# Altium PCB 幻彩灯带V0.PcbDoc
Units mm, origin at the board's own origin, x right, y up, seen from the top; angles counter-clockwise.
Board outline 60.15 x 76.21 mm, 2 copper layers (Top Layer, Bottom Layer); 26 components, 18 nets, 97 pads, 11 vias.
Unrouted connection lines stored in the file: 1.
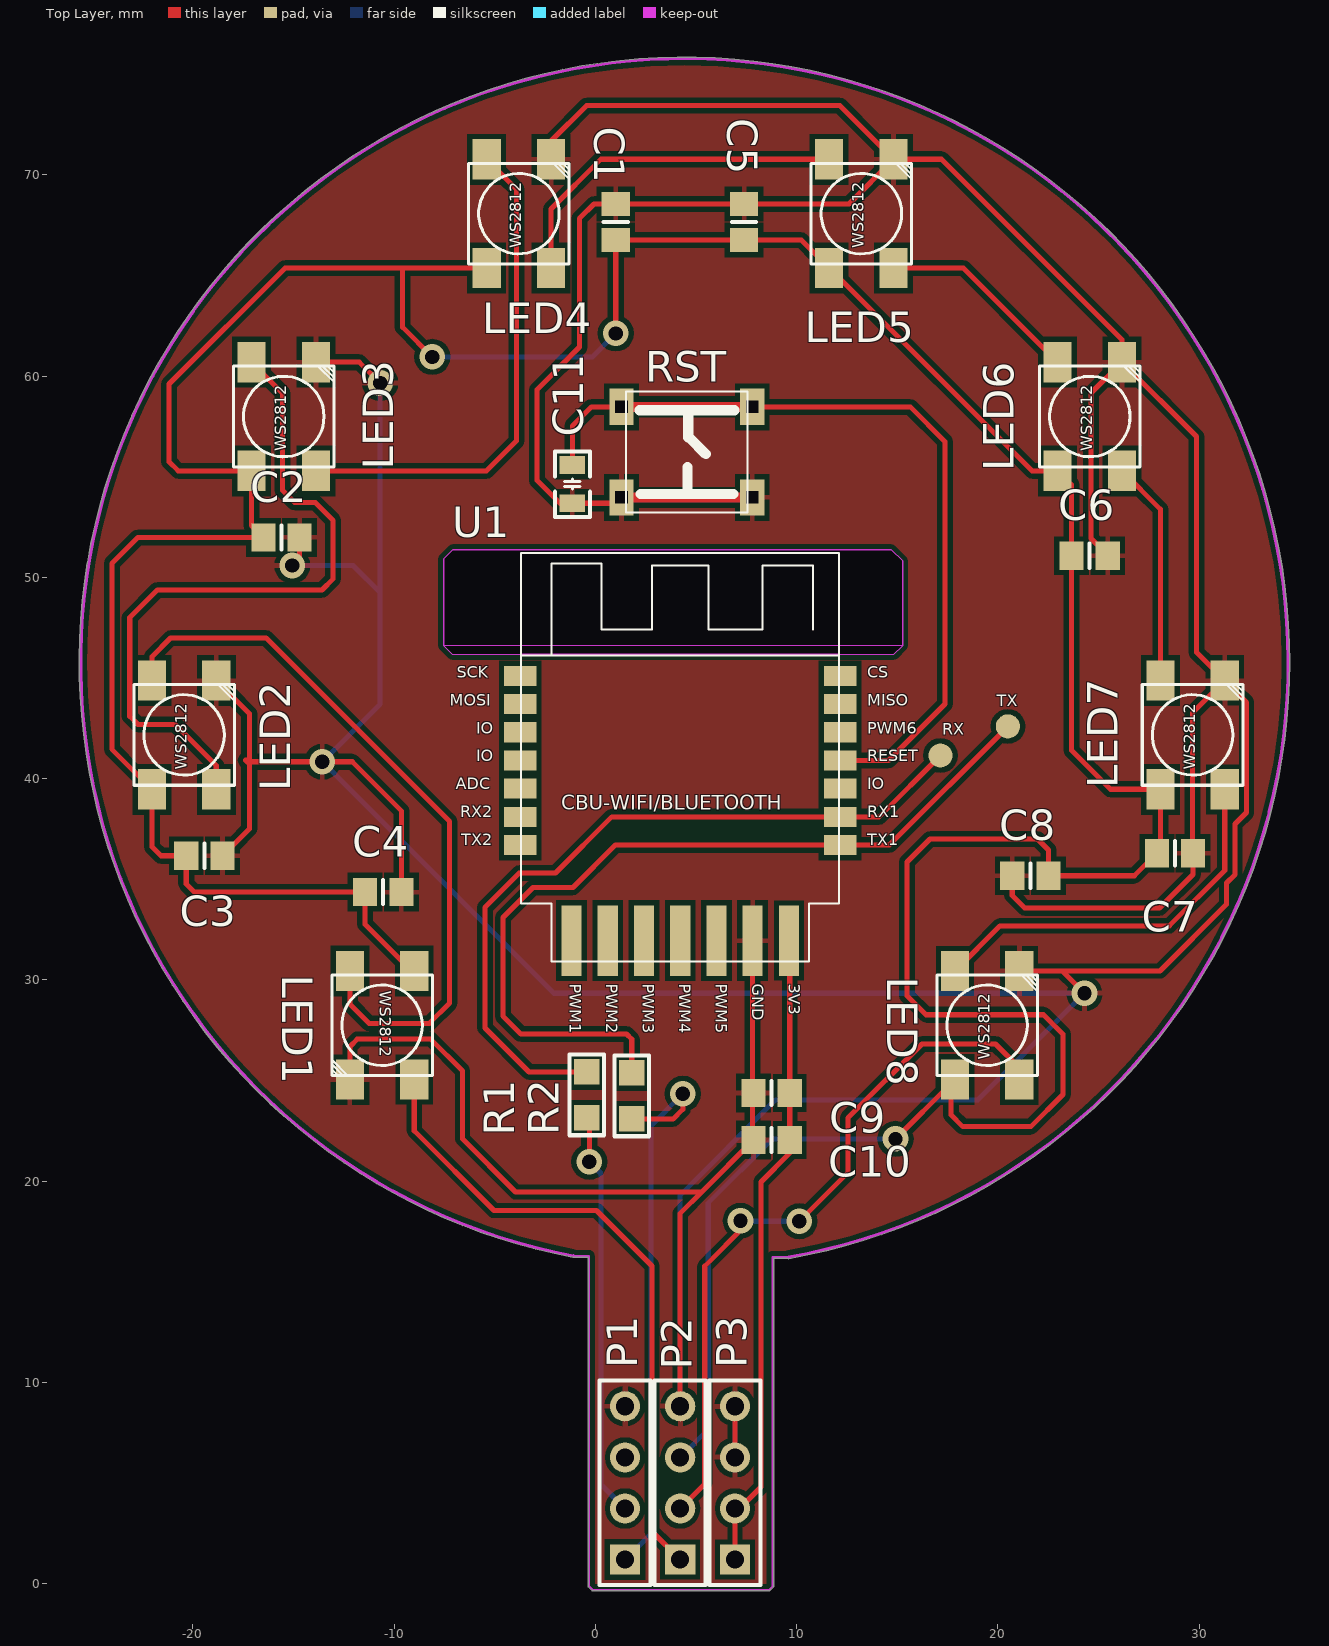
[diagram p0: Top Layer view]
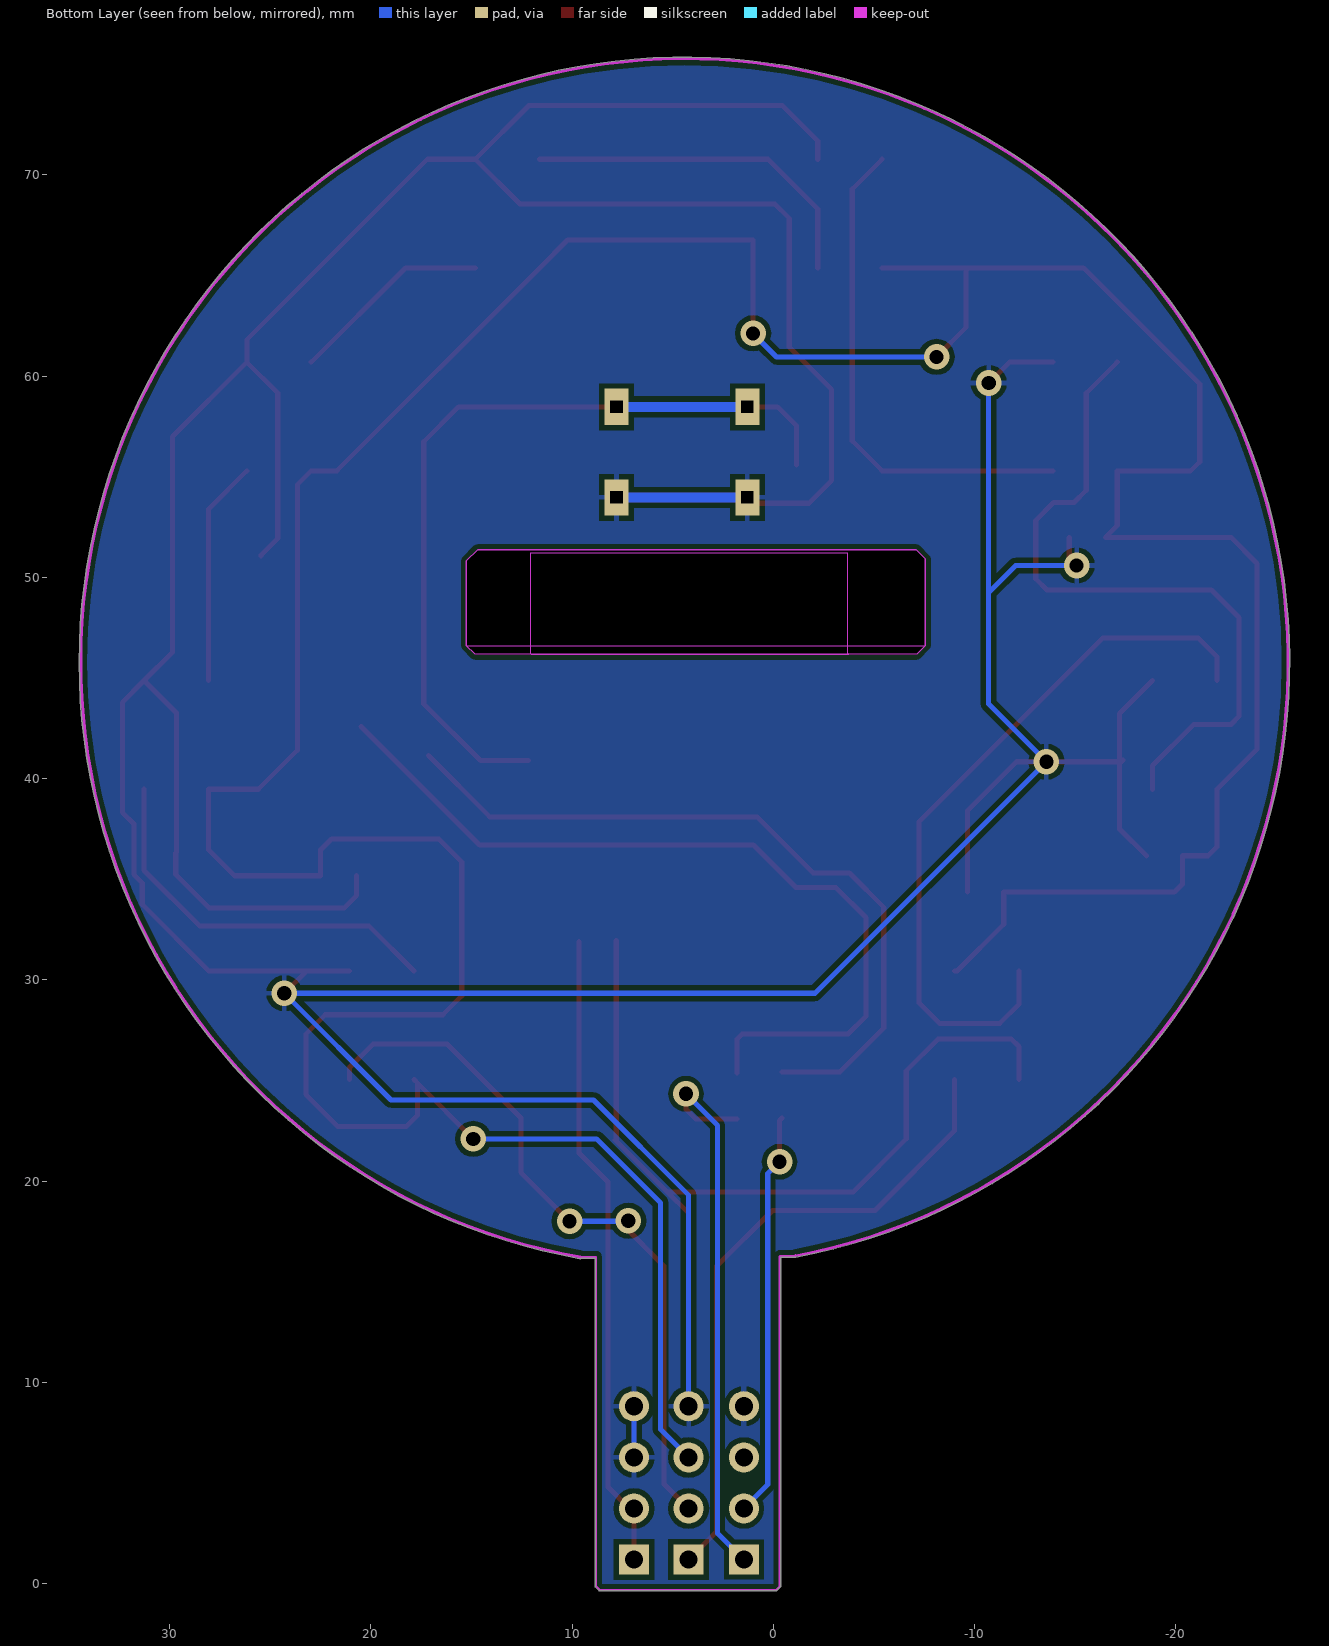
[diagram p1: Bottom Layer view, seen from below]

## Layer stack, top to bottom
Top Solder: solder mask 0.0102, Solder Resist, Dk 3.5
Top Layer: signal copper 0.0356
Dielectric 1: dielectric 0.32, FR-4, Dk 4.8
Bottom Layer: signal copper 0.0356
Bottom Solder: solder mask 0.0102, Solder Resist, Dk 3.5

## Board outline
-0.36,-0.132 ccw(c-0.31,-0.132) -0.345,-0.168 -0.346,-0.168 -0.168,-0.346 -0.168,-0.345 ccw(c-0.132,-0.31) -0.132,-0.36 8.631,-0.36 ccw(c8.631,-0.31) 8.667,-0.345 8.666,-0.346 8.844,-0.168 ccw(c8.809,-0.132) 8.859,-0.132 8.859,16.175 9.54,16.175 ccw(c9.596,16.225) 9.609,16.151 ccw(c4.421,45.776) 34.497,45.776 ccw(c4.421,45.776) -1.115,16.214 ccw(c-1.102,16.288) -1.06,16.226 -0.36,16.226
cut-out: -7.549,46.604 -7.549,50.922 -7.092,51.379 14.701,51.379 15.26,50.82 15.26,46.604
cut-out: -7.549,46.604 -7.549,50.922 -7.092,51.379 14.701,51.379 15.26,50.82 15.26,46.604
cut-out: -7.549,46.604 -7.117,46.172 14.828,46.172 15.26,46.604 15.26,50.82 14.701,51.379 -7.092,51.379 -7.549,50.922
cut-out: -3.739,46.172 -3.688,46.223 -3.688,51.201 12.085,51.201 12.085,46.223 12.034,46.172

## Design rules (kind name [scope] priority, off if disabled: settings)
Clearance [All] p1: gap=0.254
PolygonConnect [All] p1: connectstyle=Relief reliefconductorwidth=0.254 reliefentries=4 polygonreliefangle="90 Angle" airgapwidth=0.254
RoutingVias [All] p1: holewidth=0.711 width=1.27 viastyle="Through Hole" minholewidth=0.711 minwidth=1.27 maxholewidth=0.711 maxwidth=1.27
SolderMaskExpansion [All] p1: expansion=0.102
Width [All] p1: maxlimit=1 minlimit=0.254 preferedwidth=0.254
30 further rules are at their usual default settings.

## Components (designator, comment, footprint, x,y, rotation, side; value= is the part's Value field where it differs from the comment)
C1 "0.1uF" 6-0805_N 1.011,67.66 r90 top
C2 "Cap" 6-0805_N -15.601,51.989 r0 top
C3 "Cap" 6-0805_N -19.436,36.164 r0 top
C4 "Cap" 6-0805_N -10.546,34.361 r0 top
C5 "0.1uF" 6-0805_N 7.386,67.66 r270 top
C6 "0.1uF" 6-0805_N 24.557,51.074 r180 top
C7 "0.1uF" 6-0805_N 28.798,36.291 r180 top
C8 "0.1uF" 6-0805_N 21.61,35.174 r0 top
C9 "10uF" 6-0805_N 8.758,24.379 r180 top
C10 "100pF" 6-0805_N 8.758,22.042 r180 top
C11 "1uF" "C 0805_L" -1.143,54.635 r270 top
LED1 "WS2812B-4" LED -8.103,30.242 r270 top
LED2 "WS2812B-4" LED -22.941,39.67 r90 top
LED3 "WS2812B-4" LED -17.988,55.494 r90 top
LED4 "WS2812B-4" LED -6.304,65.578 r90 top
LED5 "WS2812B-4" LED 10.714,65.578 r90 top
LED6 "WS2812B-4" LED 22.067,55.494 r90 top
LED7 "WS2812B-4" LED 27.173,39.67 r90 top
LED8 "WS2812B-4" LED 16.962,25.242 r90 top
P1 "Header 4" HDR1X4 1.468,1.189 r90 top
P2 "Header 4" HDR1X4 4.211,1.189 r90 top
P3 "Header 4" HDR1X4 6.929,1.189 r90 top
R1 "1K" "R 0805_M" -0.432,24.282 r270 top
R2 "1K" "R 0805_M" 1.803,24.232 r270 top
RST "BUTTON" BUTTON6*6 1.295,53.975 r180 top
U1 "CBU-WIFI/BLE" CBU -3.688,51.201 r0 top

## Footprints (in the part's own frame and the unit in brackets; to place one, negate y for a bottom-side part, rotate by r counter-clockwise, add the part's x,y. Pads: shape width x height; smd on the part's side, far side on the other; paste and mask are expansions set on the pad)
6-0805_N [mm] "Chip Resistor, Body 2.0x1.2mm, IPC Medium Density"
  rect 1.2x1.4 smd: 1(-0.9,0) 2(0.9,0)
  silkscreen extent 0,-0.6 0,0.6, body extent -1.07,-0.7 1.07,0.7, height 0.7
BUTTON6*6 [mm] "6*6微动开关"
  rect 1.2x1.8 hole 0.6 square: 1(-6.5,0) 1(0,0) 2(-6.5,-4.5) 2(0,-4.5)
  Top Layer lines w0.5: 0,0 -6.5,0 ; 0,-4.5 -6.5,-4.5
  Bottom Layer lines w0.5: 0,0 -6.5,0 ; 0,-4.5 -6.5,-4.5
  silkscreen extent -6.25,-5.27 -0.23,0.75
"C 0805_L" [mil] "无极性贴片电容"
  rect 35x50 smd: 1(-37.4,0) 2(37.4,0)
  silkscreen extent -64,-34 64,34, body extent -39,-24 39,24, height 20
CBU [mm] "CBU-WIFI/BLE"
  rect 1.6x1 smd: 1(-0.05,-6.1) 2(-0.05,-7.5) 3(-0.05,-8.9) 4(-0.05,-10.3) 5(-0.05,-11.7) 6(-0.05,-13.1) 7(-0.05,-14.5) 15(15.85,-14.5) 16(15.85,-13.1) 17(15.85,-11.7) 18(15.85,-10.3) 19(15.85,-8.9) 20(15.85,-7.5) 21(15.85,-6.1)
  rect 1x3.5 smd: 8(2.5,-19.25) 9(4.3,-19.25) 10(6.1,-19.25) 11(7.9,-19.25) 12(9.7,-19.25) 13(11.5,-19.25) 14(13.3,-19.25)
  silkscreen extent 0,-20.3 15.8,0
HDR1X4 [mm] "Connector; Header; 4 Position"
  rect 1.5x1.5 hole 0.9: 1(0,0)
  round 1.5 hole 0.9: 2(2.54,0) 3(5.08,0) 4(7.62,0)
  silkscreen extent -1.27,-1.27 8.89,1.27
LED [mm] "WS2812B-4"
  rect 2x1.4 smd: 1(-0.2,-0.9) 2(-0.2,-4.1) 3(5.2,-4.1) 4(5.2,-0.9)
  silkscreen extent 0,-5 5,0
"R 0805_M" [mil] "1/8W贴片电阻"
  rect 50x50 smd: 1(-45.01,-0.01) 2(45,0)
  silkscreen extent -79,-34 79,34, body extent -39,-25 39,25, height 20

## Part data
C1 C5 C6 C7 C8 C9 C10: library part Cap, "Capacitor"
C2 C3 C4: "Capacitor"
C11: library part Cap
LED1 LED2 LED3 LED4 LED5 LED6 LED7 LED8: library part LED
P1 P2 P3: "Header, 4-Pin"
R1 R2: library part REGISTER

## Free pads (board coordinates)
  round 1.2 smd: 2(17.145,41.148) 3(20.498,42.596)

## Via types
v1: diameter 1.27, hole 0.711, Top Layer to Bottom Layer, 11 vias

## Nets (pads, with @x,y where several pads share a name; then routed paths per layer and width w, separated by ;. In a path a pad name is that pad's centre, name@x,y a point inside that pad or via, vN(x,y) a via of type N, cw(c..) or ccw(c..) an arc to the next point about the centre after c; other vN are vias at no path point)
3V3: C9.1 C10.1 P3.1 P3.2 U1.14 | length 32
  Top Layer w0.254: P3.1 P3.2 7.158,3.729 8.224,4.795 8.224,19.959 9.658,21.393 C10.1 C9.1 U1.14@9.658,31.905
5V: C1.1 C2.1 C3.1 C4.1 C5.2 C6.2 C7.2 C8.2 LED1.1 LED2.1 LED3.1 LED4.1 LED5.1 LED6.1 LED7.1 LED8.1 P1.3 P2.3 | length 208
  Top Layer w0.254: LED1.1 -9.124,30.442 -11.446,32.765 C4.1 -19.934,34.361 -20.336,34.763 C3.1 -21.595,36.164 -22.041,36.611 LED2.1 -24.034,41.462 -24.034,50.693 -22.738,51.989 C2.1 -17.088,52.576 LED3.1 -20.735,55.294 -21.189,55.748 -21.189,59.609 -15.42,65.378 -9.683,65.378 ; v1(-8.108,60.955) -9.581,62.428 -9.581,65.276 -9.683,65.378 ; LED4.1 -9.683,65.378 ; v1(1.011,62.123) C1.1 C5.2 10.231,66.76 LED5.1 21.697,55.294 LED6.1 23.657,54.605 C6.2 23.657,41.408 25.595,39.47 LED7.1 28.073,36.466 C7.2 26.781,35.174 C8.2 22.51,36.458 21.966,37.003 16.632,37.003 15.489,35.86 15.489,29.205 16.429,28.265 22.271,28.265 23.236,27.3 23.236,24.303 21.636,22.702 18.257,22.702 17.677,23.283 LED8.1@17.677,24.858 ; v1(14.912,22.093) LED8.1@17.677,24.858 ; LED8.1 LED8.1@17.677,24.858
  Bottom Layer w0.254: v1(-8.108,60.955) -0.158,60.955 v1(1.011,62.123) ; P2.3 5.608,7.666 5.608,18.918 8.783,22.093 v1(14.912,22.093)
GND: C1.2 C2.2 C3.2 C4.2 C5.1 C6.1 C7.1 C8.1 C9.2 C10.2 C11.2 LED1.3 LED2.3 LED3.3 LED4.3 LED5.3 LED6.3 LED7.3 LED8.3 P1.4 P2.4 P3.3 P3.4 RST.1 U1.13 | length 330.7
  Top Layer w0.254: LED2.3 -17.201,43.229 -17.201,40.838 ; C3.2 -17.201,37.5 -17.201,40.838 ; -17.379,40.914 -17.303,40.838 -17.201,40.838 ; v1(-15.067,50.592) -14.701,50.958 C2.2 ; LED3.3 -11.733,60.694 v1(-10.699,59.659) ; LED1.3 -12.203,26.685 -11.836,27.051 -8.179,27.051 -6.604,25.476 -6.604,22.098 -3.968,19.462 5.278,19.462 ; C4.2 -9.646,38.399 -12.085,40.838 v1(-13.569,40.838) -17.201,40.838 ; LED4.3 -2.204,71.684 -0.437,73.452 12.14,73.452 LED5.3 ; RST.1@1.295,53.975 1.006,53.685 C11.2 -1.768,53.685 -2.896,54.813 -2.896,59.334 -0.787,61.443 -0.787,67.843 -0.07,68.56 C1.2 C5.1 12.596,68.56 LED5.3 ; P2.4 4.211,18.395 5.278,19.462 ; P3.3 P3.4 ; C10.2@7.812,22.088 U1.13 ; C10.2 5.278,19.462 ; C8.1 20.71,34.194 21.331,33.574 28.036,33.574 29.698,35.236 C7.1 29.662,36.328 29.662,43.259 LED7.3 ; LED8.3 23.192,30.442 ; v1(24.303,29.332) 23.192,30.442 ; C6.1 25.457,51.113 24.633,51.937 24.633,59.159 LED6.3 ; LED5.3 17.198,70.778 26.167,61.808 LED6.3 ; 23.192,30.442 28.055,30.442 31.364,33.751 31.364,34.811 31.781,35.228 31.781,37.739 32.354,38.312 32.354,43.789 LED7.3 ; LED6.3 29.865,56.996 29.865,46.277 LED7.3
  Bottom Layer w0.254: v1(-15.067,50.592) -12.045,50.592 -10.699,49.245 ; v1(-10.699,59.659) -10.699,49.245 ; P2.4 4.211,19.299 8.941,24.028 18.999,24.028 v1(24.303,29.332) -2.063,29.332 v1(-13.569,40.838) -10.699,43.708 -10.699,49.245 ; P3.3 P3.4
NetC11_1: 
NetLED1_2: LED1.2 LED2.4 | length 36.6
  Top Layer w0.254: LED2.4 -22.041,46.056 -21.113,46.985 -16.363,46.985 -7.244,37.866 -7.244,28.849 -8.255,27.838 -11.252,27.838 -12.203,28.789 LED1.2
NetLED2_2: LED2.2 LED3.4 | length 35.3
  Top Layer w0.254: LED2.2 -18.841,40.65 -20.884,42.692 -22.738,42.692 -23.145,43.099 -23.145,48.001 -21.773,49.372 -13.594,49.372 -13.035,49.931 -13.035,52.827 -13.924,53.716 -14.94,53.716 -15.55,54.325 -15.55,59.155 LED3.4
NetLED3_2: LED3.2 LED4.4 | length 25.2
  Top Layer w0.254: LED3.2 -5.412,55.294 -3.917,56.789 -3.917,69.29 LED4.4
NetLED4_2: LED4.2 LED5.4 | length 17.8
  Top Layer w0.254: LED4.2 -2.204,68.306 0.267,70.778 LED5.4
NetLED5_2: LED5.2 LED6.4 | length 10.1
  Top Layer w0.254: LED5.2 18.284,65.378 LED6.4
NetLED6_2: LED6.2 LED7.4 | length 11.2
  Top Layer w0.254: LED6.2 28.073,53.388 LED7.4
NetLED7_2: LED7.2 LED8.4 | length 19.5
  Top Layer w0.254: LED8.4 20.104,32.685 28.519,32.685 31.273,35.438 LED7.2
NetR1_1: pad.2 R1.1 U1.16 | length 37.7
  Top Layer w0.254: R1.1 -3.302,25.426 -5.486,27.61 -5.486,33.604 -3.785,35.306 -1.981,35.306 0.814,38.101 U1.16 14.098,38.101 pad.2
NetR2_1: pad.3 R2.1 U1.15 | length 42.5
  Top Layer w0.254: R2.1 1.803,27.051 1.549,27.305 -3.708,27.305 -4.597,28.194 -4.597,33.096 -3.099,34.595 -1.118,34.595 0.989,36.701 U1.15 14.603,36.701 pad.3
NetRST_2: C11.1 RST.2 U1.18 | length 34.5
  Top Layer w0.254: C11.1 -1.143,57.531 -0.199,58.475 RST.2@1.295,58.475 ; RST.2@7.795,58.475 15.642,58.475 17.374,56.744 17.374,43.713 14.561,40.901 U1.18
RX: P1.1 R2.2 | length 27.8
  Top Layer w0.254: R2.2 3.861,23.089 4.343,23.571 v1(4.343,24.333)
  Bottom Layer w0.254: P1.1 2.769,2.489 2.769,22.758 v1(4.343,24.333)
SCL: LED1.4 P2.1 | length 32.3
  Top Layer w0.254: LED1.4 -9.003,22.498 -5.047,18.542 0.051,18.542 2.814,15.779 2.814,2.586 P2.1
SDA: LED8.2 P2.2 | length 35.6
  Top Layer w0.254: P2.2 5.43,4.948 5.43,15.768 v1@7.45,17.788 ; v1(10.129,18.003) 12.542,20.416 12.542,23.134 16.225,26.817 19.883,26.817 21.062,25.638 LED8.2
  Bottom Layer w0.254: v1(7.208,18.029) 7.234,18.003 v1(10.129,18.003)
TX: P1.2 R1.2 | length 20.3
  Top Layer w0.254: R1.2 -0.305,23.012 v1(-0.305,20.955)
  Bottom Layer w0.254: v1(-0.305,20.955) 0.279,20.371 0.279,4.917 P1.2 P1.2@1.366,3.729
pads on no net: U1.1 U1.2 U1.3 U1.4 U1.5 U1.6 U1.7 U1.8 U1.9 U1.10 U1.11 U1.12 U1.17 U1.19 U1.20 U1.21

## Polygon pours and split planes (outlines as drawn)
GND on Top Layer "Bottom Layer-No Net" (solid, remove dead copper, pour order 4): -31.623,78.156 -29.312,80.467 54.635,80.467 54.635,2.616 42.545,-9.474 39.853,-6.782 -29.439,-6.782
GND on Bottom Layer "Bottom Layer-No Net" (solid, remove dead copper, pour order 6): -36.398,86.106 -29.54,79.248 55.016,79.248 55.016,6.909 39.497,-8.611 35.23,-4.343 -35.662,-4.343

## Keep-outs
Keep-Out Layer:
  lines w0.1: -1.102,16.288 -1.089,16.276 -0.335,16.276 -0.31,16.251 -0.31,-0.132 -0.132,-0.31 0.173,-0.31 8.631,-0.31 8.809,-0.132 8.809,16.225 9.596,16.225
  lines w0.15: -1.102,16.288 cw(c4.421,45.776) 9.596,16.225

## Silkscreen, mask and mechanical layers (free items; w line width, h text height)
Top Overlay:
  text "TX" at 19.939,43.409 h1
  text "RX" at 17.247,41.986 h1

## Text inside footprints (layer, text, board x,y; h text height)
LED1: Top Overlay "WS2812" at -10.928,29.467 h1 r270
LED2: Top Overlay "WS2812" at -20.116,40.445 h1 r90
LED3: Top Overlay "WS2812" at -15.163,56.269 h1 r90
LED4: Top Overlay "WS2812" at -3.479,66.353 h1 r90
LED5: Top Overlay "WS2812" at 13.539,66.353 h1 r90
LED6: Top Overlay "WS2812" at 24.892,56.269 h1 r90
LED7: Top Overlay "WS2812" at 29.998,40.445 h1 r90
LED8: Top Overlay "WS2812" at 19.787,26.017 h1 r90
U1: Top Overlay "CBU-WIFI/BLUETOOTH" at -1.688,38.201 h1.25; Top Overlay "SCK" at -6.888,44.801 h1; Top Overlay "MOSI" at -7.231,43.42 h1; Top Overlay "IO" at -5.914,42.038 h1; Top Overlay "IO" at -5.914,40.657 h1; Top Overlay "ADC" at -6.945,39.275 h1; Top Overlay "RX2" at -6.714,37.883 h1; Top Overlay "TX2" at -6.664,36.501 h1; Top Overlay "PWM1" at -1.488,29.801 h1 r270; Top Overlay "PWM2" at 0.327,29.801 h1 r270; Top Overlay "PWM3" at 2.153,29.801 h1 r270; Top Overlay "PWM4" at 3.956,29.801 h1 r270; Top Overlay "PWM5" at 5.782,29.801 h1 r270; Top Overlay "GND" at 7.597,29.801 h1 r270; Top Overlay "3V3" at 9.412,29.801 h1 r270; Top Overlay "TX1" at 13.512,36.501 h1; Top Overlay "RX1" at 13.512,37.883 h1; Top Overlay "IO" at 13.512,39.275 h1; Top Overlay "RESET" at 13.512,40.657 h1; Top Overlay "PWM6" at 13.512,42.038 h1; Top Overlay "MISO" at 13.512,43.42 h1; Top Overlay "CS" at 13.512,44.801 h1